# EAGLE board whoop-v0.11td (EAGLE 6.4)
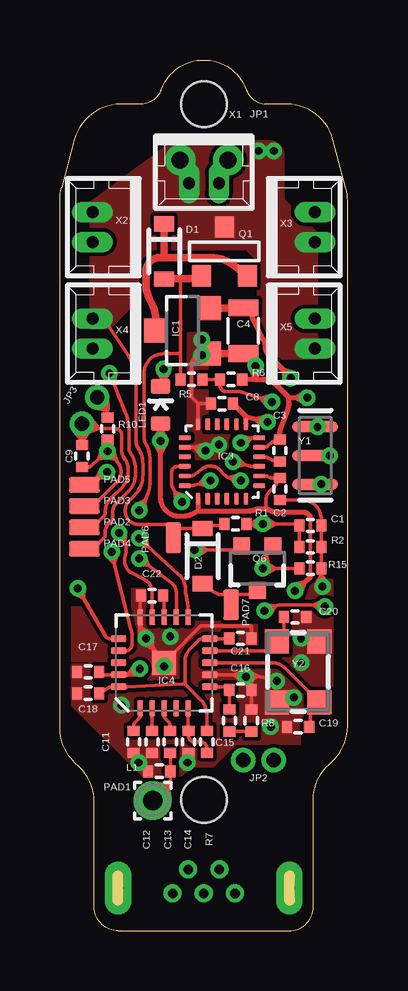
[diagram p0: board, top side]
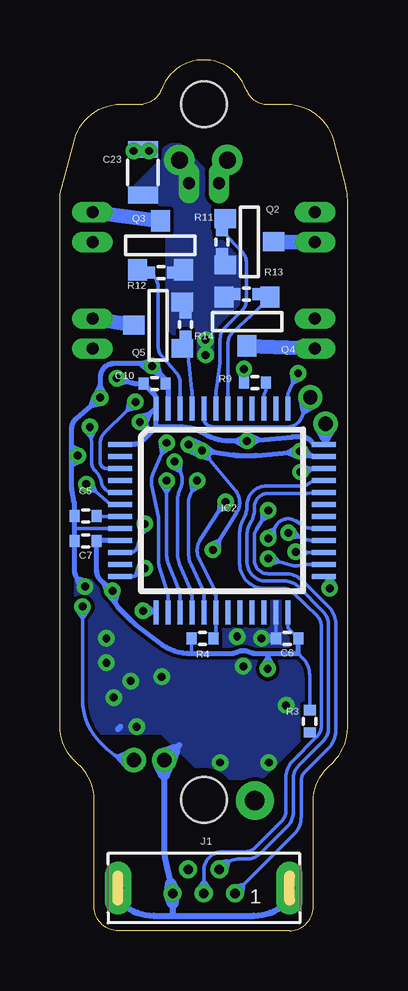
[diagram p1: board, bottom side, seen from below]

Size 12 x 36.3 mm. Coordinates in mm from the lower left corner, seen from the top.
Outline: 11.24,6.95 11.33,7.02 arc48 12,8.52 12,30.44 arc15 11.93,30.95 11.39,32.98 arc75 9.46,34.46 8.54,34.46 arc-61 7.78,35.05 arc141 4.22,35.05 arc-61 3.46,34.46 2.53,34.46 arc75 0.6,32.98 0.07,30.99 arc15 0,30.47 0,8.46 arc46 0.6,7.03 0.83,6.81 arc-46 1.43,5.38 1.43,1 arc90 2.43,0 9.57,0 arc90 10.57,1 10.57,5.45 arc-48 11.24,6.95
Copper layers (1*16): Top 0.0356mm / dielectric 1.5011mm / Bottom 0.0356mm
Design rules "oshpark-2layer": minimum track width 6mil, minimum drill 13mil, track to track 6mil, track to pad 6mil, pad to pad 6mil, via to via 6mil, smd to smd 6mil, copper to edge 15mil, drill to drill 6mil, minimum pad ring 7mil, minimum via ring 7mil, stop-mask expansion 0mil, vias tented up to drill 30mil, thermal gap 10mil
Holes 1.9 mm at 6,34.46 6,5.46
tRestrict: 6 lines
bRestrict: 2 lines

## Footprints (pad centres in the part's own frame; a part is rotated, then mirrored left to right if it is on the bottom)
0402 = smd 0.42 x 0.5: P$1 -0.46,0; P$2 0.46,0
0805 = smd 0.7 x 1.25: P$1 -0.95,0; P$2 0.95,0
SOD-323 = smd 0.63 x 0.83: A 1.15,0; C -1.15,0
SOT23 = smd 1 x 1: 1 -0.95,-1.1; 2 0.95,-1.1; 3 0,1.1
LQFP48 = smd 0.2 x 1: 1 -2.75,-4.25; 2 -2.25,-4.25; 3 -1.75,-4.25; 4 -1.25,-4.25; 5 -0.75,-4.25; 6 -0.25,-4.25; 7 0.25,-4.25; 8 0.75,-4.25; 9 1.25,-4.25; 10 1.75,-4.25; 11 2.25,-4.25; 12 2.75,-4.25; 25 2.75,4.25; 26 2.25,4.25; 27 1.75,4.25; 28 1.25,4.25; 29 0.75,4.25; 30 0.25,4.25; 31 -0.25,4.25; 32 -0.75,4.25; 33 -1.25,4.25; 34 -1.75,4.25; 35 -2.25,4.25; 36 -2.75,4.25 | smd 1 x 0.2: 13 4.25,-2.75; 14 4.25,-2.25; 15 4.25,-1.75; 16 4.25,-1.25; 17 4.25,-0.75; 18 4.25,-0.25; 19 4.25,0.25; 20 4.25,0.75; 21 4.25,1.25; 22 4.25,1.75; 23 4.25,2.25; 24 4.25,2.75; 37 -4.25,2.75; 38 -4.25,2.25; 39 -4.25,1.75; 40 -4.25,1.25; 41 -4.25,0.75; 42 -4.25,0.25; 43 -4.25,-0.25; 44 -4.25,-0.75; 45 -4.25,-1.25; 46 -4.25,-1.75; 47 -4.25,-2.25; 48 -4.25,-2.75
LEAD-QFN24 = smd 0.5 x 0.2: 1 -1.549,1; 2 -1.549,0.6; 3 -1.549,0.2; 4 -1.549,-0.2; 5 -1.549,-0.6; 6 -1.549,-1; 13 1.549,-1; 14 1.549,-0.6; 15 1.549,-0.2; 16 1.549,0.2; 17 1.549,0.6; 18 1.549,1 | smd 0.2 x 0.5: 7 -1,-1.549; 8 -0.6,-1.549; 9 -0.2,-1.549; 10 0.2,-1.549; 11 0.6,-1.549; 12 1,-1.549; 19 1,1.549; 20 0.6,1.549; 21 0.2,1.549; 22 -0.2,1.549; 23 -0.6,1.549; 24 -1,1.549
QFN20 = smd 1 x 1: 0 0,0 | smd 0.65 x 0.25: 1 -1.9,1; 2 -1.9,0.5; 3 -1.9,0; 4 -1.9,-0.5; 5 -1.9,-1; 11 1.9,-1; 12 1.9,-0.5; 13 1.9,0; 14 1.9,0.5; 15 1.9,1 | smd 0.25 x 0.65: 6 -1,-1.9; 7 -0.5,-1.9; 8 0,-1.9; 9 0.5,-1.9; 10 1,-1.9; 16 1,1.9; 17 0.5,1.9; 18 0,1.9; 19 -0.5,1.9; 20 -1,1.9
614105150721 = drill 0.4: 1 -1.3,0.22; 2 -0.65,-0.78; 3 0,0.22; 4 0.65,-0.78; 5 1.3,0.22 | drill 0.45 pad 1.1 long: SHELL -3.575,0; SHELL1 3.575,0
1X02_2MM = drill 0.7 pad 1.27: 1 0,0; 2 2,0
1X02_1.27MM = drill 0.6 pad 1.016: 1 0,0; 2 1.27,0
LED-0603 = smd 0.8 x 0.6: A 0,-0.777; C 0,0.777
1,6/0,8 = drill 0.813 pad 1.6: 1 0,0
SMD1,27-2,54 = smd 1.27 x 0.635: 1 0,0
SOT-23 = smd 0.787 x 0.889: 1 0.025,-1.016; 2 -0.94,1.016; 3 0.991,1.016
SOT323 = smd 0.7 x 0.7: 1 -0.65,-0.925; 2 0.65,-0.925; 3 0,0.925
53047-02 = drill 0.5 pad 0.698 long: 1 0.625,0.45; 2 -0.625,0.45
RESONATOR-SMD = smd 0.45 x 1.905: 1 -1.2,0; 2 0,0; 3 1.2,0
FA-20H = smd 1 x 1: 1 -1.27,-0.889; 2 1.27,-0.889; 3 1.27,0.889; 4 -1.27,0.889

## Placement (x,y rotation side)
C1  10n  [0402]  10.45,16.89 180 top
C2  10n  [0402]  9.18,18.41 90 top
C3  0u1  [0402]  9.18,20.02 270 top
C4  4u7  [0805]  7.65,25.02 90 top
C5  47n  [0402]  10.93,17.3 0 bottom
C6  0u1  [0402]  2.52,12.19 0 bottom
C7  0u1  [0402]  10.93,16.26 0 bottom
C8  0u1  [0402]  6.76,21.97 180 top
C9  0u1  [0402]  0.92,19.79 90 top
C10  0u1  [0402]  8.06,22.81 180 bottom
C11  120p  [0402]  3.08,7.87 90 top
C12  1n5  [0402]  3.84,7.87 90 top
C13  3p9  [0402]  4.6,7.87 90 top
C14  0u1  [0402]  5.37,7.87 90 top
C15  10n  [0402]  7.07,8.76 90 top
C16  560p  [0402]  7.52,10.03 180 top
C17  0u1  [0402]  1.17,10.79 0 top
C18  0u1  [0402]  1.17,9.91 0 top
C19  33p  [0402]  9.94,8.51 0 top
C20  33p  [0402]  9.81,13.08 180 top
C21  0u1  [0402]  7.52,12.19 180 top
C22  0u1  [0402]  3.84,13.97 180 top
C23  4u7  [0805]  8.54,31.62 90 bottom
D1  BAT54  [SOD-323]  4.35,28.32 270 top
D2  BAT54  [SOD-323]  5.95,15.62 270 top
IC1  MCP1703CB  [SOT23]  5.11,25.02 90 top
IC2  STM32F103CBT6  [LQFP48]  5.24,17.53 270 bottom
IC3  MPU6500  [LEAD-QFN24]  6.76,19.56 90 top
IC4  A7105  [QFN20]  4.35,11.18 90 top
J1  [614105150721]  6,1.78 180 bottom
JP1  [1X02_2MM]  7.02,32.13 180 top
JP2  Bind  [1X02_1.27MM]  7.65,7.11 0 top
JP3  Boot  [1X02_1.27MM]  1.55,22.24 240 top
L1  [0402]  4.15,6.65 0 top
LED1  [LED-0603]  4.2,21.92 0 top
PAD1  ANT  [1,6/0,8]  3.87,5.44 0 top
PAD2  VCC  [SMD1,27-2,54]  1.02,16.81 0 top
PAD3  GND  [SMD1,27-2,54]  1.02,17.7 0 top
PAD4  SWCLK  [SMD1,27-2,54]  1.02,15.93 0 top
PAD5  SWDIO  [SMD1,27-2,54]  1.02,18.59 180 top
PAD6  BUZ+  [SMD1,27-2,54]  4.73,16.38 270 top
PAD7  BUZ-  [SMD1,27-2,54]  7.14,13.59 90 top
Q1  AO3401  [SOT-23]  6.89,28.32 180 top
Q2  SI2312  [SOT-23]  4.09,28.7 90 bottom
Q3  SI2312  [SOT-23]  7.78,28.58 180 bottom
Q4  SI2312  [SOT-23]  4.22,25.4 0 bottom
Q5  SI2312  [SOT-23]  7.91,25.27 270 bottom
Q6  2N7002  [SOT323]  8.24,15.11 180 top
R1  1k  [0402]  7.32,16.97 180 top
R2  1k  [0402]  10.45,16 0 top
R3  1k5  [0402]  1.58,8.74 270 bottom
R4  10k  [0402]  6.05,12.19 180 bottom
R5  10k  [0402]  5.49,22.99 0 top
R6  15k  [0402]  7.14,22.99 0 top
R7  DNP  [0402]  6.13,7.87 270 top
R8  200  [0402]  7.98,8.76 270 top
R9  680  [0402]  3.87,22.86 180 bottom
R10  1k  [0402]  1.99,20.93 270 top
R11  10k  [0402]  5.24,28.7 90 bottom
R12  10k  [0402]  7.78,27.43 180 bottom
R13  10k  [0402]  4.22,26.54 0 bottom
R14  10k  [0402]  6.76,25.27 270 bottom
R15  10k  [0402]  10.45,15.11 180 top
X1  BAT  [53047-02]  6,31.62 180 top
X2  M4  [53047-02]  1.81,29.34 90 top
X3  M2  [53047-02]  10.19,29.34 270 top
X4  M3  [53047-02]  1.81,24.89 90 top
X5  M1  [53047-02]  10.19,24.89 270 top
Y1  8MHZ  [RESONATOR-SMD]  10.65,19.81 270 top
Y2  16 MHz  [FA-20H]  9.94,10.79 90 top

## Library data of the parts
C1-C23 L1 R1-R15 = RC.v2
D1 D2 = SparkFun-DiscreteSemi; PROD_ID: DIO-11623
IC1 = semi
IC2 = cc3d
IC3 = invensense
IC4 = A7105
J1 = micro-usb
JP1-JP3 = conn
LED1 = led; PROD_ID: DIO-00819
PAD1 = wirepad
PAD2-PAD7 = pad
Q1-Q5 = cc3d; OC_FARNELL: unknown; OC_NEWARK: unknown
Q6 = SparkFun-DiscreteSemi; PROD_ID: TRANS-11151
X1-X5 = con-molex; MF: MOLEX; MPN: 53047-0210; OC_FARNELL: 9733051; OC_NEWARK: 57H4701
Y1 = resonator; PROD_ID: XTAL-08895
Y2 = thermo

## Nets
ADC-VBAT: C1.P$2 IC2.10 R1.P$1 R2.P$1
BAT: C23.P$2 D2.C JP1.2 PAD6.1 Q1.1 R1.P$2 X1.1 X2.1 X3.1 X4.1 X5.1
BEEP: IC2.12 Q6.1 R15.P$2
BIND: IC2.13 JP2.2
GND: C1.P$1 C2.P$1 C3.P$1 C4.P$1 C5.P$1 C6.P$1 C7.P$1 C8.P$2 C9.P$1 C10.P$1 C11.P$1 C12.P$1 C14.P$1 C16.P$1 C17.P$1 C18.P$1 C19.P$1 C20.P$1 C21.P$1 C22.P$2 C23.P$1 IC1.1 IC2.8 IC2.23 IC2.35 IC2.47 IC3.11 IC3.18 IC3.20 IC4.0 IC4.7 IC4.15 J1.5 J1.SHELL J1.SHELL1 JP1.1 JP2.1 L1.P$1 PAD3.1 Q2.2 Q3.2 Q4.2 Q5.2 Q6.2 R2.P$2 R6.P$2 R8.P$1 R10.P$2 R11.P$1 R12.P$1 R13.P$1 R14.P$1 R15.P$1 X1.2 Y1.2 Y2.2 Y2.4
M1+: Q2.1 X2.2
M2+: Q4.1 X4.2
M3+: Q3.1 X3.2
M4+: Q5.1 X5.2
MPU_CLK: IC2.15 IC3.23
MPU_CS: IC2.18 IC3.22 R4.P$1
MPU_INT: IC2.14 IC3.12
MPU_MISO: IC2.16 IC3.9
MPU_MOSI: IC2.17 IC3.24
N$1: C13.P$2 IC4.3
N$2: D2.A PAD7.1 Q6.3
N$3: C3.P$2 IC3.10
N$4: C13.P$1 L1.P$2 PAD1.1
N$5: C19.P$2 IC4.8 Y2.1
N$6: C20.P$2 IC4.9 Y2.3
N$7: C12.P$2 IC4.2
N$8: C11.P$2 IC4.1
N$9: C15.P$2 C16.P$2 IC4.6
N$10: C22.P$1 IC4.13
N$11: C15.P$1 R8.P$2
N$12: C18.P$2 C21.P$2 IC4.10 IC4.20 R7.P$1
N$13: IC2.6 Y1.3
N$14: C14.P$2 IC4.5 R7.P$2
N$15: LED1.C R9.P$2
N$16: IC2.39 R9.P$1
N$17: IC2.3 R5.P$2 R6.P$1
N$19: IC2.44 JP3.1 R10.P$1
N$33: IC2.5 Y1.1
N$36: D1.C IC1.3 Q1.2
N$37: C5.P$2 IC2.7
PWM1: IC2.45 Q5.3 R14.P$2
PWM2: IC2.46 Q3.3 R12.P$2
PWM3: IC2.42 Q4.3 R13.P$2
PWM4: IC2.43 Q2.3 R11.P$2
RF_CLK: IC2.26 IC4.12
RF_CS: IC2.29 IC4.11
RF_IRQ: IC2.25 IC4.16
RF_MISO: IC2.27 IC4.17
RF_MOSI: IC2.28 IC4.14
SWCLK: IC2.37 PAD4.1
SWDIO: IC2.34 PAD5.1
USB_DM: IC2.32 J1.2
USB_DP: IC2.33 J1.3 R3.P$2
VBUS: D1.A J1.1 Q1.3 R5.P$1
VCC: C2.P$2 C4.P$2 C6.P$2 C7.P$2 C8.P$1 C9.P$2 C10.P$2 C17.P$2 IC1.2 IC2.1 IC2.9 IC2.24 IC2.36 IC2.48 IC3.1 IC3.8 IC3.13 IC4.19 JP3.2 LED1.A PAD2.1 R3.P$1 R4.P$2

## Tracks (layer width: path | path; a pad name or v marks a point on that pad's centre or on a via)
ADC-VBAT  (via drill 0.33 pad 0.69)
  Top 0.152: R2.P$1 C1.P$2 9.98,16.97 8.96,16.97 | R1.P$1 7.97,16.97 | 7.97,16.97 v8.46,16.97 | 8.96,16.97 v8.46,16.97 | 7.97,16.97 8.32,16.74 v8.46,16.97 | 7.97,16.97 8.32,17.19 v8.46,16.97 | 8.96,16.97 8.61,17.19 v8.46,16.97 | 8.96,16.97 8.61,16.74 v8.46,16.97
  Bottom 0.152: IC2.10 9.03,15.78 arc-72 8.79,15.95 8.62,16.5 | 8.62,16.5 v8.46,16.97 | 8.62,16.5 8.72,16.9 v8.46,16.97 | 8.62,16.5 8.29,16.76 v8.46,16.97
BAT  (via drill 0.33 pad 0.69)
  Top 0.152: X4.1 1.82,25.52 2.84,24 arc-34 3.18,22.88 3.18,20.35 arc35 3.24,20.16 arc-35 3.46,19.45 3.46,19.01 arc-45 3.09,18.12 2.89,17.92 arc135 3.29,16.94 4.73,16.94 | 4.73,16.94 4.75,16.76 D2.C 6.07,16.89 6.86,16.89 R1.P$2 | PAD6.1 4.73,16.94
  Bottom 0.152: v8.29,32.51 8.35,32.57 8.43,32.57 | 8.43,32.57 C23.P$2 | 8.43,32.57 8.75,32.31 v8.92,32.51 8.81,32.75 8.43,32.57
  pour Top (no thermals): 10.7,23.88 10.7,29.08 9.3,30.48 9.3,32.32 arc90 8.73,32.89 4.92,32.89 arc37 4.58,32.78 1.3,30.35 1.3,25.15 1.83,25.15 arc45 2.23,25.31 3.71,26.8 3.71,28.45 7.78,28.45 8.29,27.94 8.29,24.51 8.92,23.88
BEEP  (via drill 0.33 pad 0.69)
  Top 0.152: v8.46,15.11 8.64,15.11 | 8.64,15.11 8.96,15.11 | 8.96,15.11 R15.P$2 | Q6.1 8.64,16 8.64,15.58 | 8.64,15.58 8.64,15.11 | 8.96,15.11 8.61,15.34 v8.46,15.11 | 8.96,15.11 8.61,14.89 v8.46,15.11 | 8.64,15.58 8.31,15.33 v8.46,15.11 | 8.64,15.58 8.72,15.17 v8.46,15.11
  Bottom 0.152: IC2.12 8.97,14.78 arc-27 8.85,14.8 | 8.85,14.8 arc-12 8.81,14.83 v8.46,15.11 | 8.85,14.8 8.72,15.2 v8.46,15.11 | 8.85,14.8 8.44,14.85 v8.46,15.11
BIND  (via drill 0.33 pad 0.69)
  Top 0.152: v8.54,13.34 8.78,13.46 arc-27 9.35,13.59 10.57,13.59 | 10.57,13.59 10.83,13.59 v11.05,13.51 | v8.54,13.34 8.58,13.6 8.99,13.54 8.76,13.19 v8.54,13.34 | 10.57,13.59 10.88,13.31 v11.05,13.51 | 10.57,13.59 10.95,13.76 v11.05,13.51
  Bottom 0.152: IC2.13 7.99,13.34 8.04,13.34 | 8.04,13.34 v8.54,13.34 | JP2.2 arc22 9.51,7.23 arc23 10.05,7.58 10.32,7.85 arc45 11.05,9.62 11.05,13.02 | 11.05,13.02 v11.05,13.51 | 8.04,13.34 8.4,13.11 v8.54,13.34 | 8.04,13.34 8.4,13.56 v8.54,13.34 | 11.05,13.02 11.28,13.37 v11.05,13.51 | 11.05,13.02 10.83,13.37 v11.05,13.51
  Bottom 0.305: 9.51,7.23 9.07,7.43 JP2.2 9.18,6.87 9.51,7.23
GND  (via drill 0.33 pad 0.69)
  Top 0.152: v5.92,24 6.15,24.13 IC1.1 | C4.P$1 7.65,24 | R10.P$2 v1.99,19.99 | C9.P$1 1.15,19.33 arc42 1.32,19.39 1.62,19.66 | 1.62,19.66 v1.99,19.99 | IC3.18 5.76,21.97 | 5.76,21.97 C8.P$2 | v1.99,19.99 2.09,19.96 2.33,19.64 | 2.33,19.64 2.43,19.51 arc-37 2.55,19.16 2.55,19.11 arc-45 2.38,18.7 1.38,17.7 PAD3.1 | v5.92,24 5.52,23.72 | 5.52,23.72 5.49,23.7 5.49,22.24 5.76,21.97 | IC3.11 8.51,20.16 arc42 8.68,20.22 8.8,20.33 arc-42 8.97,20.4 9.18,20.4 C3.P$1 | v10.95,14.35 10.91,14.4 10.91,14.84 | 10.91,14.84 R15.P$1 R2.P$2 C1.P$1 10.91,17.16 arc90 10.11,17.95 C2.P$1 | v11.26,19.81 10.76,19.81 | 10.76,19.81 Y1.2 | IC3.20 5.6,20.16 | 5.6,20.16 6.08,20.16 v6.08,20.02 | IC4.15 3.35,13.94 C22.P$2 | R8.P$1 7.98,9.35 C16.P$1 7.98,10.15 | IC4.7 7.26,10.68 | 7.26,10.68 7.98,10.68 | 7.98,10.68 7.98,10.15 | C21.P$1 7.98,12.7 5.87,12.7 4.62,11.44 | 4.62,11.44 IC4.0 v4.35,11.02 | 7.98,10.68 8.25,10.61 | 8.25,10.61 8.57,10.53 | 8.57,10.53 v9.05,10.41 | Q6.2 7.42,15.88 6.11,15.88 | 6.11,15.88 v5.62,15.88 | 1.62,19.66 2.03,19.73 v1.99,19.99 | 1.62,19.66 1.73,20.06 v1.99,19.99 | 2.33,19.64 2.25,20.05 v1.99,19.99 | 2.33,19.64 1.93,19.73 v1.99,19.99 | 5.52,23.72 5.94,23.74 v5.92,24 | 5.52,23.72 5.68,24.1 v5.92,24 | 5.6,20.16 5.87,19.84 v6.08,20.02 | 5.6,20.16 6,20.27 v6.08,20.02 | 6.11,15.88 5.76,16.1 v5.62,15.88 | 6.11,15.88 5.76,15.65 v5.62,15.88 | 10.91,14.84 10.71,14.47 v10.95,14.35 | 10.91,14.84 11.16,14.52 v10.95,14.35 | 10.76,19.81 11.11,19.59 v11.26,19.81 | 10.76,19.81 11.11,20.04 v11.26,19.81 | 4.62,11.44 4.24,11.27 v4.35,11.02 | 4.62,11.44 4.62,11.02 v4.35,11.02 | 8.57,10.53 8.86,10.23 v9.05,10.41 | 8.57,10.53 8.96,10.67 v9.05,10.41 | 7.26,10.68 7.57,10.39 v7.75,10.59
  Top 0.152: 7.26,10.68 7.65,10.84 v7.75,10.59 | 7.98,10.15 8.02,10.57 v7.75,10.59 | 7.98,10.15 7.62,10.36 v7.75,10.59 | 8.25,10.61 7.89,10.82 v7.75,10.59 | 8.25,10.61 7.91,10.37 v7.75,10.59
  Top 0.203: 7.65,24 7.97,24 | 7.97,24 8.16,24 v8.16,23.55 | v8.16,23.55 8.16,23.05 | 8.16,23.05 8.16,22.99 | 8.16,22.99 R6.P$2 | 8.16,22.99 8.46,22.99 arc-45 9.03,22.75 9.56,22.23 | 9.56,22.23 9.82,22.23 | 9.82,22.23 v10.32,22.23 | C3.P$1 9.18,20.68 arc-21 9.23,20.96 9.5,21.71 arc21 9.56,21.99 9.56,22.23 | IC4.15 3.35,12.63 | 3.35,12.63 3.35,12.56 v3.59,12.19 | v3.59,12.19 arc8 IC4.0 | 7.97,24 7.92,23.57 v8.16,23.55 | 7.97,24 8.31,23.73 v8.16,23.55 | 8.16,23.05 8.37,23.43 v8.16,23.55 | 8.16,23.05 7.95,23.43 v8.16,23.55 | 9.82,22.23 10.2,22.01 v10.32,22.23 | 9.82,22.23 10.2,22.44 v10.32,22.23 | 3.35,12.63 3.35,12.19 v3.59,12.19 | 3.35,12.63 3.71,12.4 v3.59,12.19 | v3.59,12.19 3.83,12.21 3.87,11.78 3.48,11.98 v3.59,12.19 | 4.12,11.46 4.11,11.03 v4.35,11.02 4.48,11.23 4.12,11.46
  Top 0.305: C4.P$1 6.42,24.07 | 6.42,24.07 IC1.1 | 6.42,24.07 5.97,24.19 v5.92,24 6.02,23.84 6.42,24.07
  Bottom 0.152: C10.P$1 7.6,22.93 | v5.62,15.88 5.35,16.29 | 5.35,16.29 4.63,17.43 arc-73 4.69,18.37 v6.08,20.02 | IC2.8 11.38,16.78 11.39,16.76 | IC2.23 C6.P$1 | v6.08,20.02 6.16,19.76 5.76,19.64 5.81,20.05 v6.08,20.02 | 5.35,16.29 5.35,15.88 v5.62,15.88 | 5.35,16.29 5.73,16.12 v5.62,15.88
  Bottom 0.203: IC2.35 1.35,19.78 arc25 1.67,19.84 v1.99,19.99 | v1.99,19.99 2.01,19.99 3.8,19.82 arc6 3.88,19.81 4.45,19.81 arc9 4.75,19.83 5.58,19.96 | 5.58,19.96 5.95,20.02 v6.08,20.02 | v10.95,14.35 11.22,14.62 arc12 11.29,14.71 | 11.29,14.71 arc33 11.39,15.02 C7.P$1 11.39,16.76 C5.P$1 11.39,17.7 arc-11 11.4,17.86 11.5,18.34 arc11 11.51,18.49 11.51,19.39 | 11.51,19.39 11.51,19.79 | 11.51,19.79 11.51,19.81 | 11.51,19.81 v11.26,19.81 | v11.26,19.81 11.51,19.79 | 11.51,19.81 11.51,20.24 | 11.51,20.24 11.51,20.93 arc48 11.32,21.35 10.69,21.9 | 10.69,21.9 v10.32,22.23 | IC2.47 7.49,22.7 C10.P$1 R6.P$2 7.81,23.2 | 7.81,23.2 v8.16,23.55 | v8.16,23.55 8.26,23.65 8.64,23.65 | 8.64,23.65 9.75,23.65 arc-90 10.32,23.08 10.32,22.72 | 10.32,22.72 v10.32,22.23 | v3.59,12.19 3.44,12.22 3.09,12.2 | 3.09,12.2 C6.P$1 | v1.99,19.99 1.96,19.75 1.53,19.8 1.8,20.14 v1.99,19.99 | v1.99,19.99 2.12,20.19 2.48,19.94 2.08,19.77 v1.99,19.99 | 7.81,23.2 8.22,23.31 v8.16,23.55 | 7.81,23.2 7.93,23.61 v8.16,23.55 | 8.64,23.65 8.23,23.78 v8.16,23.55 | 8.64,23.65 8.32,23.36 v8.16,23.55 | 5.58,19.96 5.98,19.79 v6.08,20.02 | 5.58,19.96 5.94,20.21 v6.08,20.02 | 10.69,21.9 10.54,22.31 v10.32,22.23 | 10.69,21.9 10.27,21.99 v10.32,22.23 | 10.32,22.72 10.11,22.34 v10.32,22.23 | 10.32,22.72 10.53,22.34 v10.32,22.23 | 11.29,14.71 10.88,14.58 v10.95,14.35 | 11.29,14.71 11.19,14.29 v10.95,14.35 | 11.51,19.39 11.5,19.82 v11.26,19.81 | 11.51,19.39 11.14,19.6 v11.26,19.81 | 11.51,20.24 11.14,20.02 v11.26,19.81 | 11.51,20.24 11.5,19.8 v11.26,19.81 | 3.09,12.2 3.47,11.98 v3.59,12.19 | 3.09,12.2 3.47,12.4 v3.59,12.19
  Bottom 0.254: J1.SHELL 2.42,1.29 2.49,1.22 arc45 3.91,0.64 7.27,0.64 | J1.SHELL1 9.57,1.29 9.51,1.22 arc-45 8.09,0.64 7.27,0.64 | 7.27,0.64 7.3,0.67 7.3,1.16 J1.5 7.38,1.95 7.61,2.97 arc12 7.65,3.39 7.65,6.51 JP2.1 7.23,7.54 7.02,7.75 | 9.57,8.41 C19.P$1
  Bottom 0.508: J1.5 7.42,1.52 7.3,1.16 7.18,1.52 J1.5 | J1.5 7.19,1.62 7.38,1.95 7.42,1.57 J1.5 | JP2.1 7.41,7.03 7.23,7.54 7.74,7.35 JP2.1 | JP2.1 7.88,7 7.65,6.51 7.42,7 JP2.1
  Bottom 0.686: v6.08,20.02 v6.63,20.27
  other vias: 5.92,24.64 2.57,9.4 4.6,12.27 10.06,11.18 9.76,9.73 8.79,8.51 5.31,7.01 3.28,7.01 10.06,12.19
  pour Bottom (no thermals): 7.02,32.77 7.26,32.77 arc-90 7.78,32.25 7.78,32.13 9.05,30.86 9.05,30.48 8.03,30.48 7.52,29.97 7.52,25.15 6.25,23.88 5.62,23.88 5.62,24.89 4.48,26.04 4.48,30.23
  pour Top (no thermals): 6.13,24.89 5.37,24.89 5.37,20.95 5.49,20.83 5.49,19.69 6.51,19.69 7.27,20.45 7.27,21.46 6.13,21.46
  pour Bottom (no thermals): 1.05,8.89 0.54,8.89 0.54,13.46 2.44,13.46 2.44,13.84 2.83,14.22 3.71,14.22 4.48,13.46 9.56,13.46 10.7,14.61 11.33,14.61 11.33,8.76 10.83,8.26 7.75,8.26 5.85,6.35 3.59,6.35
  pour Top (no thermals): 2.44,13.46 2.44,13.84 2.83,14.22 3.71,14.22 4.48,13.46 9.56,13.46 10.7,14.61 11.33,14.61 11.33,8.76 10.42,7.82 7.32,7.82 6.38,6.88 5.49,6.86 4.98,6.35 3.59,6.35 0.54,9.4 0.54,13.46
M1+
  Bottom 0.61: X2.2 3.06,28.71 Q2.1
M2+
  Bottom 0.61: X4.2 Q4.1
M3+
  Bottom 0.61: X3.2 Q3.1
M4+
  Bottom 0.61: X5.2 Q5.1
MPU_CLK  (via drill 0.33 pad 0.69)
  Top 0.152: IC3.23 5.44,18.96 arc37 5.59,19.01 5.93,19.26 arc-88 6.71,19.17 6.79,19.07 arc34 7.07,18.89 | 7.07,18.89 arc3 7.1,18.88 v7.55,18.77 | 7.07,18.89 7.36,18.59 v7.55,18.77 | 7.07,18.89 7.46,19.02 v7.55,18.77
  Bottom 0.152: IC2.15 6.99,13.88 arc-21 7.06,14.25 7.48,15.34 arc21 7.55,15.71 7.55,18.27 | v7.55,18.77 7.55,18.27 | 7.55,18.27 7.77,18.63 v7.55,18.77 | 7.55,18.27 7.33,18.63 v7.55,18.77
MPU_CS  (via drill 0.33 pad 0.69)
  Top 0.152: IC3.22 4.91,19.36 arc90 4.66,19.11 4.66,18.75 arc35 4.8,18.29 | 4.8,18.29 arc0 4.8,18.28 v5.09,17.88 | 4.8,18.29 4.82,17.87 v5.09,17.88 | 4.8,18.29 5.19,18.13 v5.09,17.88
  Bottom 0.152: 5.39,17.49 6.15,16.29 arc-61 6.18,15.48 5.59,14.31 arc26 5.49,13.85 IC2.18 5.49,12.29 R4.P$1 | 5.39,17.49 5.14,17.88 v5.09,17.88 | 5.39,17.49 5.35,17.9 v5.09,17.88 | 5.39,17.49 5,17.63 v5.09,17.88
MPU_INT  (via drill 0.33 pad 0.69)
  Top 0.152: v7.55,20.34 7.87,20.5 arc-26 8.12,20.56 IC3.12 | v7.55,20.34 7.59,20.61 8,20.55 7.72,20.22 v7.55,20.34
  Bottom 0.152: IC2.14 7.49,13.89 arc-19 7.54,14.22 7.83,15.05 arc19 7.88,15.38 7.88,17.07 arc-11 7.89,17.22 8.17,18.59 arc35 8.12,19.07 v7.55,20.34 | v7.55,20.34 7.81,20.3 7.75,19.89 7.4,20.12 v7.55,20.34
MPU_MISO  (via drill 0.33 pad 0.69)
  Top 0.152: IC3.9 8.05,19.36 arc-15 7.91,19.38 7.7,19.43 | 7.7,19.43 v7.22,19.56 | 7.7,19.43 7.42,19.74 v7.22,19.56 | 7.7,19.43 7.3,19.3 v7.22,19.56
  Bottom 0.152: IC2.16 6.49,13.86 arc-23 6.57,14.27 7.01,15.27 arc23 7.09,15.68 7.09,17.97 arc20 7.04,18.24 6.95,18.51 arc-45 6.98,19.13 | 6.98,19.13 arc-4 7,19.18 v7.22,19.56 | 6.98,19.13 7.34,19.32 v7.22,19.56 | 6.98,19.13 6.95,19.54 v7.22,19.56
MPU_MOSI  (via drill 0.33 pad 0.69)
  Top 0.152: IC3.24 5.45,18.56 arc16 5.61,18.58 5.8,18.63 | 5.8,18.63 v6.28,18.77 | 5.8,18.63 6.2,18.52 v6.28,18.77 | 5.8,18.63 6.08,18.95 v6.28,18.77
  Bottom 0.152: IC2.17 5.99,13.86 arc-25 6.08,14.29 6.54,15.29 arc25 6.63,15.72 6.63,17.85 arc26 6.55,18.2 6.5,18.33 | 6.5,18.33 v6.28,18.77 | 6.5,18.33 6.54,18.74 v6.28,18.77 | 6.5,18.33 6.14,18.54 v6.28,18.77
N$1
  Top 0.152: C13.P$2 4.6,8.53 arc45 4.53,8.71 4.42,8.82 arc-45 4.35,9 IC4.3
N$2
  Top 0.152: Q6.3 8.07,14.02 7.14,14.02 | D2.A 6.06,14.47 6.34,14.19 arc45 6.75,14.02 7.14,14.02 | 7.14,14.02 PAD7.1
N$3
  Top 0.152: IC3.10 8.53,19.76 arc-29 8.65,19.73 8.81,19.64 arc29 8.94,19.61 9.18,19.61 C3.P$2
N$4
  Top 0.152: C13.P$1 L1.P$2 4.61,6.28 arc-45 4.53,6.1 4.44,6.01 PAD1.1
  Top 0.305: 4.44,6.01 3.96,6.08 PAD1.1 4.51,5.52 4.44,6.01
N$5
  Top 0.152: IC4.8 8.84,11.18 arc-45 9.41,10.94 Y2.1 10.45,9.53 10.45,8.51 C19.P$2
N$6
  Top 0.152: IC4.9 8.66,11.68 | 8.66,11.68 Y2.3 | C20.P$2 9.35,13.03 9.35,11.7 8.66,11.68
N$7
  Top 0.152: IC4.2 3.85,8.34 C12.P$2
N$8
  Top 0.152: IC4.1 3.35,9.01 arc-45 3.27,8.83 3.15,8.71 arc45 3.08,8.53 C11.P$2
N$9
  Top 0.152: IC4.6 7.05,10.18 C16.P$2 7.06,9.35 C15.P$2
N$10
  Top 0.152: IC4.13 4.35,13.92 C22.P$1
N$11
  Top 0.152: R8.P$2 C15.P$1
N$12
  Top 0.152: 5.21,10.29 5.11,10.29 2.81,10.18 IC4.20 2.16,10.18 arc36 2.01,10.13 1.95,10.08 arc-36 1.8,10.03 1.63,10.03 C18.P$2 | R7.P$1 6.13,9.04 arc45 5.89,9.61 5.21,10.29 | C21.P$2 7.05,12.18 IC4.10 5.95,12.18 arc45 5.77,12.1 5.45,11.78 arc45 5.21,11.21 5.21,10.29
N$13  (via drill 0.33 pad 0.69)
  Top 0.152: v10.9,18.62 11.15,18.61 Y1.3
  Bottom 0.152: IC2.6 9.88,17.78 10.52,18.3 | 10.52,18.3 v10.9,18.62 | 10.52,18.3 10.93,18.35 v10.9,18.62 | 10.52,18.3 10.65,18.7 v10.9,18.62
N$14
  Top 0.152: IC4.5 5.35,8.35 C14.P$2 5.37,8.13 arc90 5.62,7.87 5.87,7.87 arc-90 6.13,7.62 R7.P$2
N$15  (via drill 0.33 pad 0.69)
  Top 0.152: v4.32,23.42 4.32,22.92 | 4.32,22.92 4.32,22.76 LED1.C | 4.32,22.92 4.55,23.27 v4.32,23.42 | 4.32,22.92 4.1,23.27 v4.32,23.42
  Bottom 0.152: R9.P$2 4.35,22.92 | 4.35,22.92 4.4,23.07 v4.32,23.42 | 4.35,22.92 4.55,23.29 v4.32,23.42 | 4.35,22.92 4.11,23.26 v4.32,23.42
N$16
  Bottom 0.152: IC2.39 3.49,22.3 arc24 3.47,22.4 3.43,22.48 arc-24 3.41,22.59 R9.P$1
N$17  (via drill 0.33 pad 0.69)
  Top 0.152: v8.85,22.05 7.64,22.44 arc18 7.4,22.48 6.94,22.48 arc-90 6.68,22.73 R6.P$1 R5.P$2 | v8.85,22.05 8.64,21.88 8.37,22.2 8.78,22.3 v8.85,22.05
  Bottom 0.152: IC2.3 10.06,19.28 arc90 10.32,19.53 10.32,20.34 arc45 10.15,20.74 9.2,21.7 | 9.2,21.7 v8.85,22.05 | 9.2,21.7 9.11,22.1 v8.85,22.05 | 9.2,21.7 8.79,21.79 v8.85,22.05
N$19
  Top 0.152: R10.P$1 1.99,21.61 arc38 1.93,21.76 1.93,21.77 JP3.1
  Top 0.305: 1.93,21.77 1.91,22.25 JP3.1 1.46,21.9 1.93,21.77
  Bottom 0.152: IC2.44 5.99,21.32 arc-60 5.86,21.1 5.84,21.09 arc-30 5.53,21.01 2.51,21.01 arc-66 1.93,21.38 1.8,21.69 JP3.1
  Bottom 0.305: 1.8,21.69 1.9,22.16 JP3.1 1.38,21.93 1.8,21.69
N$33  (via drill 0.33 pad 0.69)
  Top 0.152: v10.75,21.01 Y1.1
  Bottom 0.152: IC2.5 9.95,18.28 10.07,18.37 arc36 10.26,18.67 10.31,18.84 arc-28 10.44,19.08 10.54,19.19 arc43 10.67,19.52 10.67,20.34 10.69,20.51 | 10.69,20.51 v10.75,21.01 | 10.69,20.51 10.96,20.84 v10.75,21.01 | 10.69,20.51 10.51,20.89 v10.75,21.01
N$36
  Top 0.305: Q1.2 7.21,27.77 arc37 6.32,28.07 4.35,28.07 | 4.35,28.07 D1.C | 4.35,28.07 4.16,28.07 arc90 3.59,27.5 3.59,26.99 arc24 3.72,26.38 3.88,26.03 arc-24 4.01,25.42 IC1.3
N$37
  Bottom 0.152: IC2.7 10.45,17.28 C5.P$2
PWM1
  Bottom 0.152: IC2.45 6.49,22.34 arc-7 6.5,22.57 6.62,23.64 arc7 6.63,23.86 6.63,24.03 Q5.3 6.76,24.41 R14.P$2
PWM2
  Bottom 0.152: Q3.3 8.64,27.3 R12.P$2 8.09,27.29 arc45 7.91,26.84 7.91,24.37 arc-41 7.75,23.95 7.15,23.27 arc41 6.99,22.85 IC2.46
PWM3
  Bottom 0.152: R13.P$2 3.28,26.47 Q4.3 3.46,26.16 4.8,24.95 arc-45 4.99,24.5 IC2.42
PWM4
  Bottom 0.152: IC2.43 5.49,22.35 arc8 5.47,22.61 5.33,23.67 arc-8 5.31,23.93 5.31,24.68 arc45 5.13,25.13 4.41,25.85 arc-45 4.22,26.3 4.22,27.86 arc-44 4.4,28.31 R11.P$2 5.24,29.57 Q2.3
RF_CLK  (via drill 0.33 pad 0.69)
  Top 0.152: v3.31,15.52 3.7,15.22 | 3.7,15.22 4.63,14.52 arc-53 4.86,14.07 IC4.12 | 3.7,15.22 3.56,15.61 v3.31,15.52 | 3.7,15.22 3.29,15.25 v3.31,15.52
  Bottom 0.152: IC2.26 1.65,15.28 arc-14 1.94,15.24 arc34 2.47,15.27 v3.31,15.52 | v3.31,15.52 3.23,15.26 2.83,15.38 3.1,15.69 v3.31,15.52
RF_CS  (via drill 0.33 pad 0.69)
  Top 0.152: IC4.11 5.35,13.41 arc10 5.34,13.55 5.25,14.03 arc-10 5.24,14.17 5.24,14.25 arc48 4.98,14.84 3.67,16.02 | 3.67,16.02 v3.31,16.36 | 3.67,16.02 3.56,16.43 v3.31,16.36 | 3.67,16.02 3.26,16.14 v3.31,16.36
  Bottom 0.152: IC2.29 1.45,16.78 arc33 1.89,16.91 2.16,17.09 arc-91 2.96,16.91 3.04,16.78 | 3.04,16.78 v3.31,16.36 | 3.04,16.78 3.04,16.36 v3.31,16.36 | 3.04,16.78 3.42,16.6 v3.31,16.36
RF_IRQ  (via drill 0.33 pad 0.69)
  Top 0.152: IC4.16 2.1,12.18 arc-60 1.88,12.3 0.99,13.85 | 0.99,13.85 v0.74,14.28 | 0.99,13.85 1.01,14.26 v0.74,14.28 | 0.99,13.85 0.62,14.04 v0.74,14.28
  Bottom 0.152: v0.74,14.28 0.74,14.77 | 0.74,14.77 0.74,14.78 IC2.25 | 0.74,14.77 0.52,14.42 v0.74,14.28 | 0.74,14.77 0.97,14.42 v0.74,14.28
RF_MISO  (via drill 0.33 pad 0.69)
  Top 0.152: IC4.17 2.75,11.68 arc90 3,11.93 3,12.33 arc20 2.96,12.6 2.17,15.72 v2.17,15.8 | v2.17,15.8 2.41,15.71 2.27,15.31 1.97,15.61 v2.17,15.8
  Bottom 0.152: IC2.27 1.67,15.78 | 1.67,15.78 2.17,15.78 v2.17,15.8 | 1.67,15.78 2.03,15.57 v2.17,15.8 | 1.67,15.78 2.01,16.02 v2.17,15.8
RF_MOSI  (via drill 0.33 pad 0.69)
  Top 0.152: v2.47,16.59 2.69,16.19 arc-41 2.76,15.79 2.71,15.53 arc74 3,14.92 3.53,14.64 arc-62 3.84,14.13 IC4.14 | v2.47,16.59 2.74,16.57 2.71,16.15 2.37,16.4 v2.47,16.59
  Bottom 0.152: IC2.28 1.49,16.28 arc20 1.77,16.33 2,16.41 | 2,16.41 v2.47,16.59 | 2,16.41 2.49,16.35 v2.47,16.59 | 2,16.41 2.26,16.75 v2.47,16.59
SWCLK  (via drill 0.33 pad 0.69)
  Top 0.152: v2.06,23.24 2.73,21.62 arc-22 2.88,20.87 2.88,20.18 arc33 2.97,19.87 2.99,19.84 arc-33 3.15,19.28 3.15,19.04 arc-45 2.85,18.32 2.36,17.82 arc45 2.19,17.42 2.19,17.14 2.05,17.01 arc45 1.88,16.6 1.88,16.43 1.38,15.93 PAD4.1 | v2.06,23.24 2.33,23.19 2.25,22.78 1.91,23.02 v2.06,23.24
  Bottom 0.152: IC2.37 2.49,22.28 arc28 2.42,22.57 2.29,22.8 | 2.29,22.8 v2.06,23.24 | 2.29,22.8 2.33,23.22 v2.06,23.24 | 2.29,22.8 1.93,23.01 v2.06,23.24
SWDIO  (via drill 0.33 pad 0.69)
  Top 0.152: v1.96,19.13 1.53,18.88 | 1.53,18.88 PAD5.1 | 1.53,18.88 1.95,18.86 v1.96,19.13 | 1.53,18.88 1.73,19.25 v1.96,19.13
  Bottom 0.152: IC2.34 1.46,19.28 arc-18 1.7,19.24 1.88,19.18 v1.96,19.13 | v1.96,19.13 1.76,18.95 1.49,19.27 1.89,19.38 v1.96,19.13
USB_DM
  Bottom 0.152: IC2.32 1.44,18.28 1.71,18.24 3.32,18.24 arc-90 3.89,17.67 3.89,17.55 arc28 4.01,17.07 4.11,16.89 arc-28 4.2,16.52 4.2,15.38 arc-90 3.4,14.58 2.62,14.58 arc45 2.06,14.35 1.03,13.32 arc45 0.79,12.75 0.79,8.46 arc45 1.03,7.89 2.03,6.89 arc-45 2.27,6.32 2.27,4.93 arc45 2.5,4.36 3.63,3.23 arc45 4.2,3 4.49,3 arc-45 5.21,2.7 J1.2
  Bottom 0.305: 5.05,2.83 5.13,2.51 J1.2 5.38,2.78 5.05,2.83
USB_DP
  Bottom 0.152: IC2.33 1.45,18.78 1.58,18.67 arc39 1.94,18.54 3.4,18.54 arc-90 4.2,17.74 4.2,17.68 arc25 4.27,17.34 4.41,17.05 arc-25 4.5,16.61 4.5,15.3 arc-90 3.47,14.28 2.68,14.28 arc44 2.28,14.11 1.27,13.12 arc46 1.1,12.71 1.1,8.52 arc45 1.26,8.11 1.34,8.04 | 1.58,8.15 R3.P$2 1.34,8.04 | 1.34,8.04 2.27,7.11 arc-45 2.57,6.38 2.57,4.99 arc45 2.74,4.58 3.85,3.47 arc45 4.26,3.3 5.2,3.3 arc-90 6,2.5 6,1.96 J1.3
  Bottom 0.305: 6,1.96 5.81,1.69 J1.3 6.19,1.69 6,1.96
VBUS  (via drill 0.33 pad 0.69)
  Top 0.152: 5.04,24.18 5.04,24.05 4.31,24.05 arc90 3.51,23.25 3.51,20.59 arc28 3.58,20.32 3.59,20.29 arc-28 3.77,19.6 3.77,18.74 arc-29 3.58,18.03 v3.31,17.53 | 5.04,24.18 5.04,27.18 | R5.P$1 5.03,23.57 5.04,24.18 | v3.31,17.53 3.18,17.76 3.54,17.96 3.57,17.54 v3.31,17.53
  Top 0.305: D1.A 5.04,27.18 5.9,27.18 Q1.3
  Bottom 0.152: v3.31,17.53 3.57,17.11 | 3.57,17.11 3.81,16.73 arc-32 3.89,16.42 3.89,15.46 arc-90 3.32,14.88 2.59,14.88 arc45 1.86,14.58 0.79,13.51 arc45 0.49,12.78 0.49,8.35 arc45 0.79,7.62 1.77,6.64 arc-45 1.94,6.24 1.94,4.75 arc45 2.24,4.02 4.42,1.84 J1.1 | 3.57,17.11 3.57,17.52 v3.31,17.53 | 3.57,17.11 3.19,17.29 v3.31,17.53
  Bottom 0.305: 4.42,1.84 4.48,1.52 J1.1 4.74,1.78 4.42,1.84
VCC  (via drill 0.33 pad 0.69)
  Top 0.152: C9.P$2 0.92,20.3 0.92,20.54 JP3.2 1.39,21.01 arc16 1.93,20.93 2.32,20.93 arc-90 2.57,20.68 2.57,20.06 arc33 2.66,19.75 2.72,19.66 arc-33 2.85,19.22 2.85,19.08 arc-45 2.62,18.51 2.12,18.01 arc45 1.88,17.45 1.88,17.43 arc-45 1.81,17.25 1.38,16.81 PAD2.1 | IC3.8 8.57,18.96 arc-28 8.69,18.93 8.74,18.9 arc28 8.85,18.88 9.02,18.88 | LED1.A 4.2,20.92 | 4.2,20.92 v4.2,20.42 | 10.45,17.27 10.45,14.73 | 8.59,17.6 8.59,17.93 arc-49 8.78,18.36 8.94,18.49 arc49 9.02,18.68 9.02,18.88 | C2.P$2 9.02,18.88 | IC4.19 1.75,10.68 C17.P$2 | 4.2,20.92 3.97,20.56 v4.2,20.42 | 4.2,20.92 4.42,20.56 v4.2,20.42
  Top 0.203: IC3.1 5.76,17.5 | 5.76,17.5 5.49,17.36 arc-27 5.12,17.27 5,17.27 arc-90 4.2,18.07 4.2,19.93 | 4.2,19.93 v4.2,20.42 | 5.76,17.5 7.87,17.5 arc17 8.04,17.53 8.2,17.58 arc-17 8.37,17.6 8.59,17.6 8.84,17.5 arc23 9.06,17.45 10.16,17.45 arc-45 10.34,17.38 10.45,17.27 | 10.45,14.73 v9.81,14.17 | IC3.13 7.76,21.43 | 7.76,21.43 C8.P$1 | 7.76,21.43 8.19,21.33 | 8.19,21.33 v8.67,21.21 | v9.63,23.04 9.66,23.04 9.29,23.4 | 9.29,23.4 8.73,23.96 arc-45 8.56,24.37 8.56,24.37 arc28 8.5,24.64 8.1,25.4 arc-28 8.03,25.67 8.03,25.81 C4.P$2 | IC4.19 2.7,10.68 arc26 2.95,10.73 v3.33,10.92 | 9.29,23.4 9.4,22.98 v9.63,23.04 | 9.29,23.4 9.71,23.27 v9.63,23.04 | 4.2,19.93 4.41,20.3 v4.2,20.42 | 4.2,19.93 3.99,20.3 v4.2,20.42 | 8.19,21.33 8.5,21.03 v8.67,21.21 | 8.19,21.33 8.6,21.44 v8.67,21.21 | v9.81,14.17 9.76,14.41 10.18,14.5 10.04,14.09 v9.81,14.17 | v3.33,10.92 3.32,10.68 2.89,10.71 3.14,11.06 v3.33,10.92
  Top 0.305: C4.P$2 IC1.2 | JP3.2 1.21,20.93 0.92,20.54 0.63,20.93 JP3.2 | JP3.2 1.2,21.36 1.5,20.98 1.04,20.81 JP3.2
  Bottom 0.152: IC2.36 0.92,20.3 | 10.45,16.28 C7.P$2 10.45,16.23 | IC2.24 2.49,12.62 C6.P$2 | R4.P$2 6.51,11.56 | 2.06,11.56 1.88,11.38 arc45 1.58,10.65 R3.P$1
  Bottom 0.203: v4.2,20.42 4.69,20.42 | 4.69,20.42 4.93,20.42 arc31 5.97,20.71 5.98,20.72 arc-31 7.01,21.01 7.99,21.01 | 7.99,21.01 IC2.48 | 7.99,21.01 8.29,20.7 | 8.29,20.7 8.55,20.44 arc45 8.96,20.28 IC2.1 | v8.67,21.21 8.32,20.86 | 8.32,20.86 8.29,20.83 8.29,20.7 | JP3.2 0.92,20.54 0.92,20.28 IC2.36 1.38,20.28 1.54,20.43 arc-45 1.94,20.6 2.08,20.6 arc-5 2.3,20.59 3.7,20.46 | 3.7,20.46 4.12,20.42 v4.2,20.42 | IC2.9 10.47,16.28 C7.P$2 10.47,15.01 arc-49 10.28,14.58 v9.81,14.17 | v9.63,23.04 8.98,22.84 arc-17 8.81,22.81 C10.P$2 8.06,22.35 arc45 7.99,22.17 IC2.48 | IC2.48 v8.67,21.21 | v9.81,14.17 arc-26 9.7,13.69 | 9.7,13.69 arc-19 9.49,13.39 9.04,12.94 arc-7 8.79,12.73 7.87,12.02 arc-38 6.51,11.56 4.87,11.56 arc-27 4.61,11.62 4.61,11.62 arc53 4.09,11.62 4.09,11.62 arc-27 3.83,11.56 3.33,11.56 | 3.33,11.56 2.06,11.56 C6.P$2 | v3.33,10.92 3.33,11.42 | 3.33,11.42 3.33,11.56 | v9.63,23.04 9.58,22.8 9.16,22.89 9.46,23.2 v9.63,23.04 | 4.69,20.42 4.31,20.63 v4.2,20.42 | 4.69,20.42 4.31,20.21 v4.2,20.42 | 3.7,20.46 4.06,20.22 v4.2,20.42 | 3.7,20.46 4.1,20.64 v4.2,20.42 | 8.32,20.86 8.73,20.98 v8.67,21.21 | 8.32,20.86 8.44,21.27 v8.67,21.21 | v8.67,21.21 8.44,21.12 8.29,21.53 8.71,21.45 v8.67,21.21 | v9.81,14.17 9.88,14.26 10.18,14.5 10.04,14.09 v9.81,14.17 | 9.7,13.69 9.99,14.01 v9.81,14.17 | 9.7,13.69 9.58,14.11 v9.81,14.17 | 3.33,11.42 3.12,11.04 v3.33,10.92 | 3.33,11.42 3.54,11.04 v3.33,10.92
  Bottom 0.406: 0.92,20.54 1.18,20.98 JP3.2 0.66,20.98 0.92,20.54

## Text on the board
_tPlace: + | + | + | + | +
_tNames: EachiWhoop
_bNames: USB
_tValues: BAT | M4 | M2 | M3 | M1 | IO | GND | VCC | CLK | B+ | B- | ANT | Bind